# EAGLE board yrl039-1_0 (EAGLE 9.5.0)
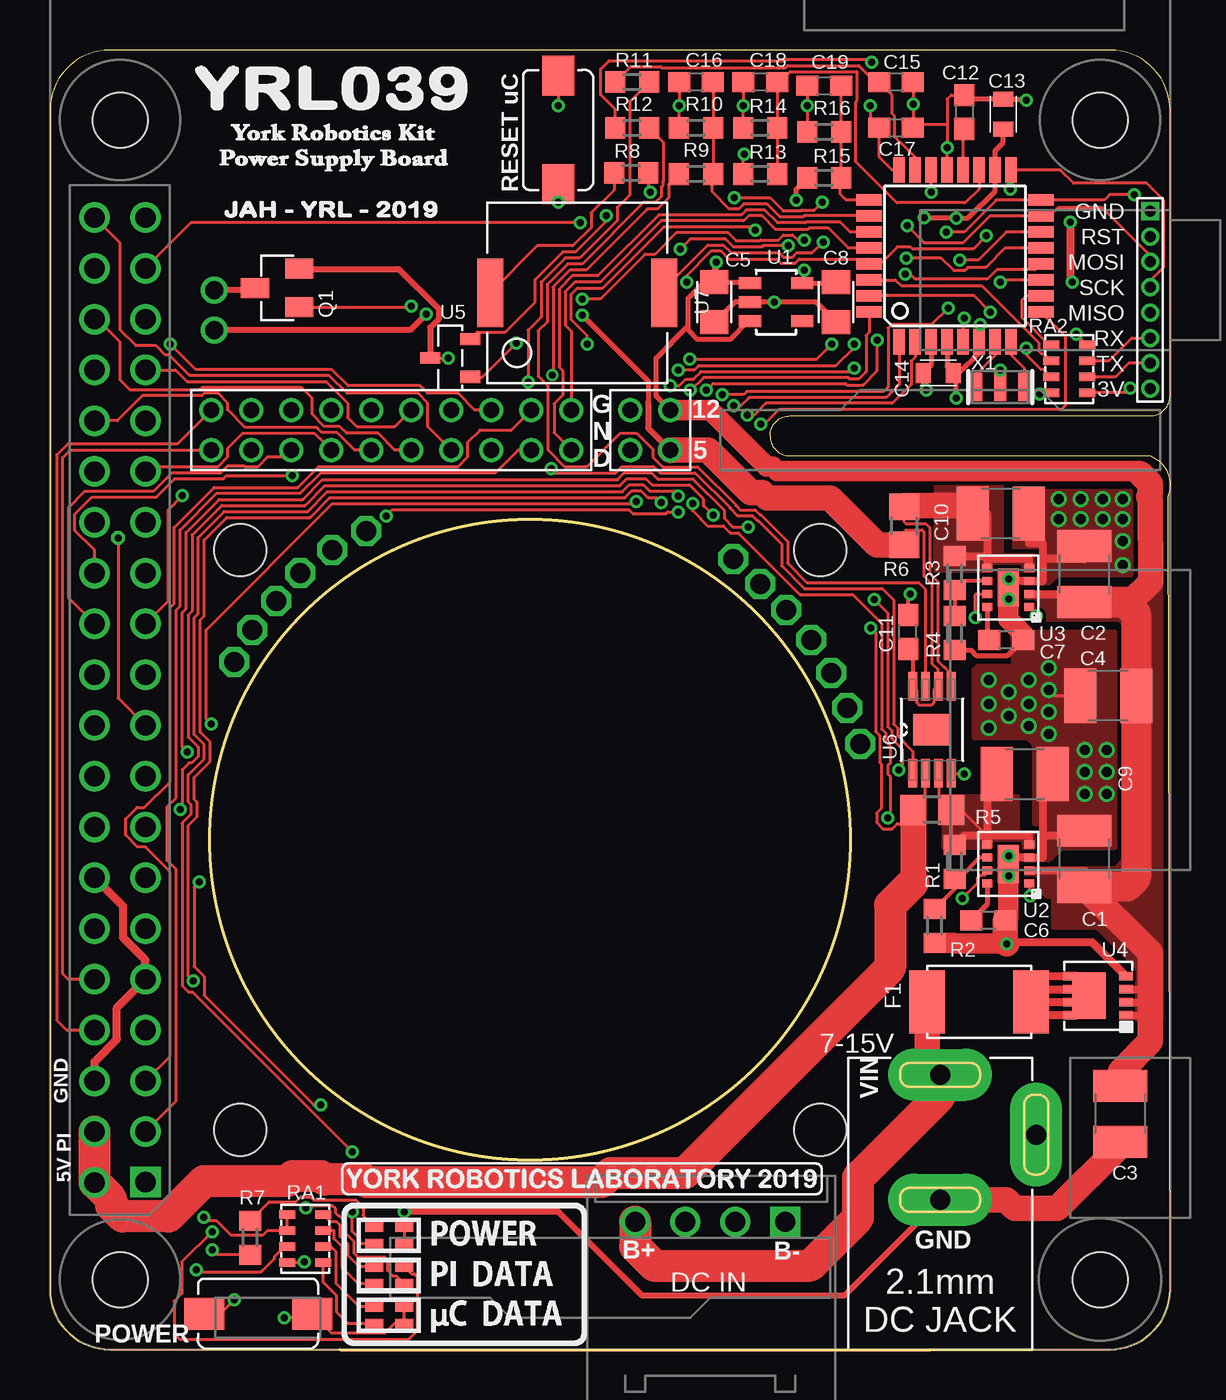
[diagram p0: board, top side]
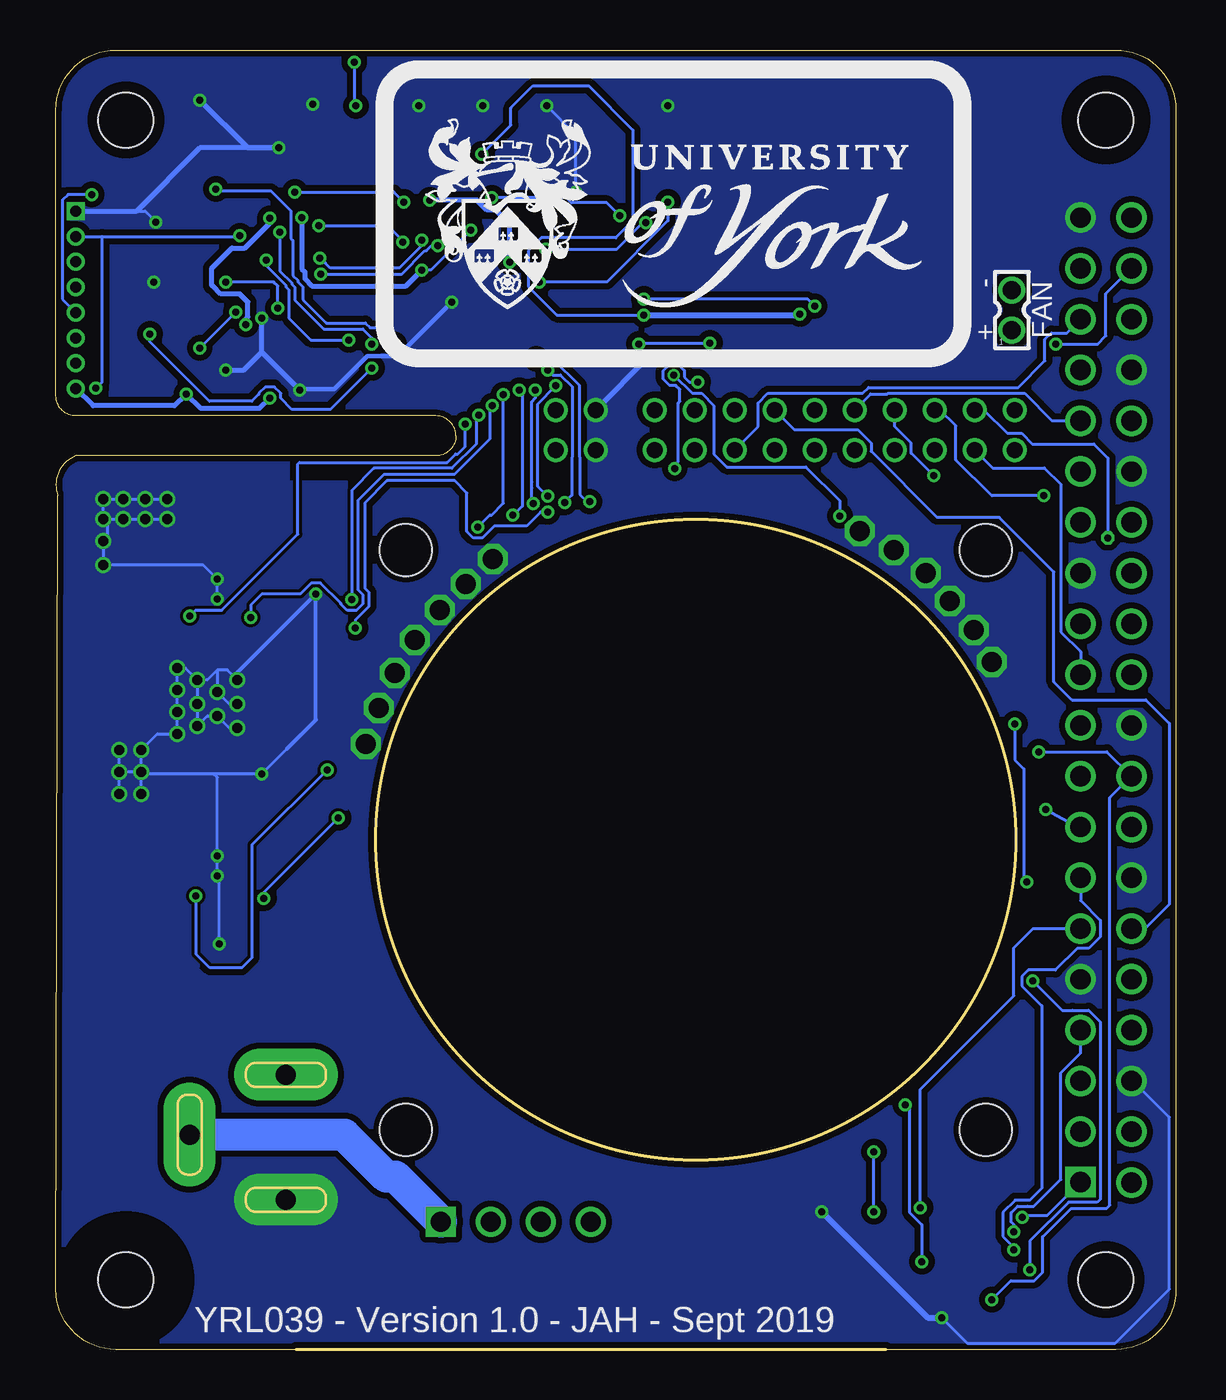
[diagram p1: board, bottom side, seen from below]

Size 56 x 65 mm. Coordinates in mm from the lower left corner, seen from the top.
Outline: 14.5,0 3,0 arc-90 0,3 0,62 arc-90 3,65 53,65 arc-90 56,62 56,47.7 arc-90 55,46.7 37,46.7 arc90 36,45.7 arc90 37,44.7 55,44.7 arc-90 55.9,42.7 56,3 arc-90 53,0 44,0
Outline: 14.5,0 18.5,0
Outline: 37.5,0 44,0
Outline: 14.5,0 44,0
Outline: circle at 24,25.5 radius 16
Copper layers (1*16): Top 0.018mm / dielectric 1.55mm / Bottom 0.018mm
Design rules "eC_2Layer_PClass6_BaseCopperO18_eCDefault": minimum track width 0.15mm, minimum drill 0.35mm, track to track 0.15mm, track to pad 0.15mm, pad to pad 0.15mm, via to via 0.15mm, smd to smd 0mil, copper to edge 0.25mm, drill to drill 0.35mm, minimum pad ring 0.175mm, minimum via ring 0.125mm, stop-mask expansion 0mil, vias tented up to drill 0.45mm, thermal gap 0.2mm
Holes 2.6 mm at 9.5,11 38.5,11 38.5,40 9.5,40
tRestrict: area 2.2,2.2 to 4.8,4.8; area 2.7,60.7 to 4.3,62.3; area 51,60 to 54,63; area 51,1.9 to 54,5
bRestrict: area 51,1.9 to 54,5; area 2,2 to 5,5; area 51.7,60.7 to 53.3,62.3; area 1.7,59.7 to 5.3,63.3

## Footprints (pad centres in the part's own frame; a part is rotated, then mirrored left to right if it is on the bottom)
C1210 = smd 1.6 x 2.7: 1 -1.4,0; 2 1.4,0
0805 = smd 1.2 x 1.4: P$1 -1,0; P$2 1,0
C0603 = smd 1.1 x 1: 1 -0.85,0; 2 0.85,0
0603-RESISTOR = smd 0.75 x 1: 1 -0.75,0; 2 0.75,0
PTC-FUSE-1812L260/16 = smd 1.78 x 3.15: P$1 2.6,0; P$2 -2.6,0
8-PIN-CONNECTOR-LHS = drill 0.55 pad 0.85 square: 1-GND 0,-4.445 | drill 0.55 pad 0.85: 2-RESET 0,-3.175; 3-MOSI 0,-1.905; 4-SCK 0,-0.635; 5-MISO 0,0.635; 6-RX 0,1.905; 7-TX 0,3.175; 8-3V 0,4.445
CONNECTOR-PAIRS = drill 0.8: AUDIO -14.94,-1; AUDIO_ON -12.94,-1; CE0 -18.94,-1; CE1 -16.94,1; GND1 -2,-1; GND2 -2,1; GPIO5 -16.94,-1; GPIO6 -14.94,1; GPIO13 -12.94,1; GPIO21 -10.94,-1; I2S_B -10.94,1; I2S_D -8.94,1; I2S_W -8.94,-1; MISO -20.94,-1; MOSI -20.94,1; RXD -22.94,-1; SCL -6.94,1; SCL_UC -4.94,1; SCLK -18.94,1; SDA -6.94,-1; SDA_UC -4.94,-1; TXD -22.94,1; V5 0,-1; V12 0,1
2.1MM-CON-SWITCHCRAFT-RAPC722X = drill 1 pad 2.6 long: PIN 0,13.74; SLEEVE 0,7.49; SWITCH 4.81,10.75
JST-4PIN-XH-RA-1516291 = drill 1: P$1 0,0; P$2 0,-2.5; P$3 0,-5 | drill 1 square: P$4 0,-7.5
3-LED-STATUS = smd 0.9 x 0.5: PI_DATA_GRN_A 1.8,4.05; PI_DATA_GRN_C 3.3,4.05; PI_DATA_RED_A 1.8,3.2; PI_DATA_RED_C 3.3,3.2; PWR_GRN_A 1.8,6.05; PWR_GRN_C 3.3,6.05; PWR_RED_A 1.8,5.2; PWR_RED_C 3.3,5.2; UC_DATA_GRN_A 1.8,2.05; UC_DATA_GRN_C 3.3,2.05; UC_DATA_RED_A 1.8,1.2; UC_DATA_RED_C 3.3,1.2
RPI3 = drill 1.016 square: P$1 8.37,51.23 | drill 1.016: P$2 8.357,53.772; P$3 10.897,51.232; P$4 10.897,53.772; P$5 13.437,51.232; P$6 13.437,53.772; P$7 15.977,51.232; P$8 15.977,53.772; P$9 18.517,51.232; P$10 18.517,53.772; P$11 21.057,51.232; P$12 21.057,53.772; P$13 23.597,51.232; P$14 23.597,53.772; P$15 26.137,51.232; P$16 26.137,53.772; P$17 28.677,51.232; P$18 28.677,53.772; P$19 31.217,51.232; P$20 31.217,53.772; P$21 33.757,51.232; P$22 33.757,53.772; P$23 36.297,51.232; P$24 36.297,53.772; P$25 38.837,51.232; P$26 38.837,53.772; P$27 41.377,51.232; P$28 41.377,53.772; P$29 43.917,51.232; P$30 43.917,53.772; P$31 46.457,51.232; P$32 46.457,53.772; P$33 48.997,51.232; P$34 48.997,53.772; P$35 51.537,51.232; P$36 51.537,53.772; P$37 54.077,51.232; P$38 54.077,53.772; P$39 56.617,51.232; P$40 56.617,53.772 | hole 2.75: 3.5,3.5; 61.5,3.5; 3.5,52.5; 61.5,52.5
PKMCS-PIEZO = smd 1.3 x 3.4: P$1 -4.35,0; P$2 4.35,0
FDV303N-SOT-23-NMOS = smd 1 x 1.4: P$1 -0.95,-1.1; P$2 0.95,-1.1; P$3 0,1.1
R0603 = smd 1 x 1.1: 1 -0.85,0; 2 0.85,0
R0805 = smd 1.3 x 1.5: 1 -0.95,0; 2 0.95,0
1206-RES-ARRAY = smd 0.42 x 0.8: P$1 -1.2,-0.9; P$2 -0.4,-0.9; P$3 0.4,-0.9; P$4 1.2,-0.9; P$5 1.2,0.9; P$6 0.4,0.9; P$7 -0.4,0.9; P$8 -1.2,0.9
6X3.5-SWITCH = smd 2 x 1.6: 1 -2.7,0; 2 2.7,0
INA138-CURRENTSHUNT = smd 1.1 x 0.6: P$1 -1.3,0.95; P$2 -1.3,0; P$3 -1.3,-0.95; P$4 1.3,-0.95; P$5 1.3,0.95
TPS82130-MODULE = smd 0.5 x 0.4: P$1 -1.05,0.975; P$2 -1.05,0.325; P$3 -1.05,-0.325; P$4 -1.05,-0.975; P$5 1.05,-0.975; P$6 1.05,-0.325; P$7 1.05,0.325; P$8 1.05,0.975 | smd 1.1 x 1.9: P$9 0,0
FR014H5JZ = smd 0.42 x 0.7: P$1 -0.975,-1.4; P$2 -0.325,-1.4; P$3 0.325,-1.4; P$4 0.975,-1.4; P$5 0.975,1.4; P$6 0.325,1.4; P$7 -0.325,1.4; P$8 -0.975,1.4 | smd 2.37 x 1.7: P$9 0,0.45
TC1046-TEMP-SENSOR = smd 0.6 x 1: P$1 -0.95,-1; P$2 0.95,-1; P$3 0,1
SOP65P490X110-9N = smd 1.422 x 0.432: 1 -2.184,0.965; 2 -2.184,0.33; 3 -2.184,-0.33; 4 -2.184,-0.965; 5 2.184,-0.965; 6 2.184,-0.33; 7 2.184,0.33; 8 2.184,0.965 | smd 1.575 x 1.88: 9 0,0
TQFP32-08 = smd 1.27 x 0.559: 1 -4.293,2.8; 2 -4.293,2; 3 -4.293,1.2; 4 -4.293,0.4; 5 -4.293,-0.4; 6 -4.293,-1.2; 7 -4.293,-2; 8 -4.293,-2.8; 17 4.293,-2.8; 18 4.293,-2; 19 4.293,-1.2; 20 4.293,-0.4; 21 4.293,0.4; 22 4.293,1.2; 23 4.293,2; 24 4.293,2.8 | smd 0.559 x 1.27: 9 -2.8,-4.293; 10 -2,-4.293; 11 -1.2,-4.293; 12 -0.4,-4.293; 13 0.4,-4.293; 14 1.2,-4.293; 15 2,-4.293; 16 2.8,-4.293; 25 2.8,4.293; 26 2,4.293; 27 1.2,4.293; 28 0.4,4.293; 29 -0.4,4.293; 30 -1.2,4.293; 31 -2,4.293; 32 -2.8,4.293
RESONATOR = smd 0.6 x 1.4: 1 -1.2,0; 2 0,0; 3 1.2,0
87758-0216 = drill 0.9 pad 1.27: 1 0,-1; 2 0,1

## Placement (x,y rotation side)
C1  10uF 25V  [C1210]  51.72,24.55 90 top
C2  10uF 25V  [C1210]  51.72,38.78 90 top
C3  10uF 25V  [C1210]  53.5,11.8 270 top
C4  10uF 25V  [C1210]  52.9,32.7 180 top
C5  1u 25V  [0805]  33.2,52.4 90 top
C6  3.3nF  [C0603]  46.91,21.47 0 top
C7  3.3nF  [C0603]  47.81,35.5 0 top
C8  1uF  [0805]  39.3,52.4 90 top
C9  47uF 10V  [C1210]  48.74,28.79 0 top
C10  47uF 10V  [C1210]  47.54,41.82 0 top
C11  100nF  [C0603]  42.9,35.9 90 top
C12  100n  [C0603]  45.7,61.9 270 top
C13  1u  [0603-RESISTOR]  47.65,61.8 90 top
C14  100n  [0603-RESISTOR]  44.4,48.85 180 top
C15  100n  [C0603]  42.3,63.4 0 top
C16  100n  [C0603]  32.3,63.4 180 top
C17  100n  [C0603]  42.3,61.1 0 top
C18  100n  [C0603]  35.5,63.4 180 top
C19  100n  [C0603]  38.7,63.2 180 top
F1  1812L260/16  [PTC-FUSE-1812L260/16]  46.45,17.4 180 top
J1  8-PIN-ARD-CON-LHS  [8-PIN-CONNECTOR-LHS]  55,52.5 180 top
J2  CONNECTOR-PAIRS  [CONNECTOR-PAIRS]  31,46 0 top
J3  DC-JACK-RAPC7222X  [2.1MM-CON-SWITCHCRAFT-RAPC722X]  44.5,0 0 top
J4  JST-4PIN-RA-1516291  [JST-4PIN-XH-RA-1516291]  29.26,6.39 90 top
LED1  3-LED-STATUS-PANEL  [3-LED-STATUS]  14.4,0.1 0 top
LOGO1  YRL039  [YRL039]  7.1,55.7 0 top
LOGO2  UOY-LOGO-30MM  [UY-SS-30MM-WIDE]  40,49.15 0 bottom
LOGO3  YRL-2019-LOGO  [YRL2019-LOGO]  14.55,7.7 0 top
PCB1  RPI3  [RPI3]  56,0 90 top
PZ1  PIEZO-PKMCS0909E4000-2529461  [PKMCS-PIEZO]  26.35,52.85 180 top
Q1  FDV303N-MOSFET-9845020  [FDV303N-SOT-23-NMOS]  11.35,53.1 90 top
R1  523k  [R0603]  45.23,24.4 90 top
R2  100k  [R0603]  44.23,21.2 90 top
R3  523k  [R0603]  45.23,38.83 90 top
R4  100k  [R0603]  45.23,35.83 90 top
R5  5m  [R0805]  44.1,27 180 top
R6  5m  [R0805]  42.7,41.2 270 top
R7  1K  [R0603]  10,5.6 270 top
R8  100  [R0603]  29.05,58.85 180 top
R9  400K  [R0603]  32.3,58.8 180 top
R10  100K  [R0603]  32.3,61.1 0 top
R11  10K  [R0603]  29.1,63.4 0 top
R12  10K  [R0603]  29.1,61.1 0 top
R13  400K  [R0603]  35.5,58.8 180 top
R14  100K  [R0603]  35.5,61.1 0 top
R15  1M4  [R0603]  38.7,58.6 180 top
R16  100K  [R0603]  38.7,60.9 0 top
RA1  1K  [1206-RES-ARRAY]  12.75,5.55 270 top
RA2  1K  [1206-RES-ARRAY]  50.95,49.05 270 top
SW1  SWITCH-9471898  [6X3.5-SWITCH]  10.4,1.8 0 top
SW2  SWITCH-9471898  [6X3.5-SWITCH]  25.4,61 90 top
U1  NCP718-3V3LDO-2981166  [INA138-CURRENTSHUNT]  36.3,52.4 0 top
U2  TPS82130  [TPS82130-MODULE]  47.91,24.28 180 top
U3  TPS82130  [TPS82130-MODULE]  47.91,38.11 180 top
U4  FR014H5JZ  [FR014H5JZ]  52.4,17.7 90 top
U5  TC1046-1212685  [TC1046-TEMP-SENSOR]  20,49.6 90 top
U6  INA2180A4IDGKT  [SOP65P490X110-9N]  44.1,31 90 top
U7  ATMEGA328P-AU  [TQFP32-08]  45.25,54.7 90 top
X1  CSTCE8 8MHz Res.  [RESONATOR]  47.5,48.15 0 top
X2  87758-0216  [87758-0216]  8.2,52 0 bottom

## Library data of the parts
C1-C4 C6 C7 C9-C11 C15-C19 = rcl; SPICEPREFIX: C
C5 C8 = YRL-Passives
C12 = rcl
C13 C14 = idea
F1 LOGO3 = yrl028-library
J1 U1 = yrl029
J2-J4 = yrl012-exported
LED1 PCB1 = YRL028-014
LOGO1 Q1 U2-U5 = yrl039-library
LOGO2 = yrl-logos
PZ1 = yrl025-andgate
R1-R7 R9-R16 = rcl; SPICEPREFIX: R
R8 = resistor
RA1 RA2 = yrl012-exported2
SW1 SW2 = epuck-zero-lib
U6 = INA2180A4IDGKT; DESCRIPTION: INA2180 Low/High-Side Voltage Output Current-Sense Amplifier Dual Channel -0.2V to 26V 8-Pin VSSOP T/R; DIGI-KEY_PART_NUMBER: 296-47944-1-ND; DIGI-KEY_PURCHASE_URL: https://www.digikey.com/product-detail/en/texas-instruments/INA2180A4IDGKT/296-47944-1-ND/8286320?utm_source=snapeda&utm_medium=aggregator&utm_campaign=symbol; MF: Texas Instruments; MP: INA2180A4IDGKT; PACKAGE: MSOP-8 Texas Instruments
U7 = IntegratedCircuits; CASE: TQFP32_7x7; MONTHLY_USAGE: _____; PART_NUMBER: ATMEGA328P-AU; PRICE: _____; SUPPLIER: _____; TYPE: Circuito_Integrato
X1 = YRL028-007; MONTHLY_USAGE: _____; PART_NUMBER: CSTCE16M0V53-R0; PRICE: _____; SUPPLIER: _____; TYPE: Cristalli
X2 = con-molex; MF: MOLEX; MPN: 87758-0216; OC_FARNELL: unknown; OC_NEWARK: 94M1513

## Nets
+3V3_ARD: C8.P$2 C13.1 C14.1 J1.8-3V RA2.P$4 U1.P$5 U5.P$1 U7.4 U7.6 U7.18
+3V3_PI: PCB1.P$1 RA1.P$1 RA1.P$2
+5V_AUX: C11.1 J2.V5 R6.2 R13.2 U6.6 U6.8 X2.1
+5V_PI: PCB1.P$2 PCB1.P$4 R5.2 R9.2 U6.2
ARD_AUX: PCB1.P$37 U7.12
ARD_PC3: PCB1.P$15 U7.14
AREF: C12.2 U7.20
AUDIO_ON: J2.AUDIO_ON PCB1.P$36
AUDIO_OUT: J2.AUDIO PCB1.P$32
BATTERY-: J3.SWITCH J4.P$4
CE0: J2.CE0 PCB1.P$24
CE1: J2.CE1 PCB1.P$26
D11/MOSI: J1.3-MOSI PZ1.P$1 U7.15
D12/MISO: J1.5-MISO RA1.P$3 U7.16
D13/SCK: J1.4-SCK RA1.P$4 U7.17
ENABLE_V5_AUX: U3.P$1 U7.9
ENABLE_V5_PI: U2.P$1 U7.2
FAN_PWM: Q1.P$1 U7.13
GND: C1.2 C2.2 C3.2 C4.2 C5.P$1 C6.2 C7.2 C8.P$1 C9.2 C10.2 C11.2 C12.1 C13.2 C14.2 C15.2 C16.2 C17.2 C18.2 C19.2 J1.1-GND J2.GND1 J2.GND2 J3.SLEEVE LED1.PWR_GRN_C LED1.PWR_RED_C LED1.UC_DATA_GRN_C LED1.UC_DATA_RED_C PCB1.P$6 PCB1.P$9 PCB1.P$14 PCB1.P$20 PCB1.P$25 PCB1.P$30 PCB1.P$34 PCB1.P$39 Q1.P$2 R2.1 R4.1 R8.1 R10.1 R14.1 R16.1 SW1.2 SW2.2 U1.P$2 U2.P$3 U2.P$9 U3.P$3 U3.P$9 U4.P$4 U5.P$3 U6.4 U7.3 U7.5 U7.21 X1.2
GPIO5: J2.GPIO5 PCB1.P$29
GPIO6: J2.GPIO6 PCB1.P$31
GPIO13: J2.GPIO13 PCB1.P$33
GPIO21: J2.GPIO21 PCB1.P$40
I2S_BCLK: J2.I2S_B PCB1.P$12
I2S_DATA: J2.I2S_D PCB1.P$38
I2S_WS: J2.I2S_W PCB1.P$35
ISENSE_AUX_LPF: C17.1 R12.1 U7.24
ISENSE_PI_LPF: C15.1 R11.1 U7.23
MISO: J2.MISO PCB1.P$21
MOSI: J2.MOSI PCB1.P$19
N$1: RA2.P$3 U7.31
N$2: RA2.P$2 U7.30
N$3: LED1.PWR_GRN_A R7.1
N$4: Q1.P$3 X2.2
N$8: C7.1 U3.P$8
N$9: R3.1 R4.2 U3.P$6
N$10: C6.1 U2.P$8
N$11: R1.1 R2.2 U2.P$6
N$18: U7.7 X1.1
N$19: U7.8 X1.3
N$28: PZ1.P$2 R8.2
N$36: LED1.PI_DATA_GRN_A RA1.P$8
N$37: LED1.PI_DATA_RED_A RA1.P$7
PCB_TEMP: U5.P$2 U7.22
PDIV_V5_AUX_LPF: C18.1 R13.1 R14.2 U7.19
PDIV_V5_PI_LPF: C16.1 R9.1 R10.2 U7.26
PDIV_VBATT_LPF: C19.1 R15.1 R16.2 U7.25
PGOOD_AUX: U3.P$7 U7.1
PGOOD_PI: U2.P$7 U7.32
PI_DATA_GRN_C: LED1.PI_DATA_GRN_C PCB1.P$7
PI_DATA_RED_C: LED1.PI_DATA_RED_C PCB1.P$11
POWER_BUTTON: PCB1.P$18 SW1.1 U7.11
POWER_LED_GREEN: PCB1.P$13 R7.2
RED_POWER: LED1.PWR_RED_A RA2.P$8
RED_POWER_LED: RA2.P$1 U7.10
RESET: J1.2-RESET RA2.P$5 SW2.1 U7.29
RX: J1.6-RX RA2.P$7
RXD: J2.RXD PCB1.P$10
SCL_MASTER: J2.SCL PCB1.P$5
SCL_UC: J2.SCL_UC U7.28
SCLK: J2.SCLK PCB1.P$23
SDA_MASTER: J2.SDA PCB1.P$3
SDA_UC: J2.SDA_UC U7.27
TX: J1.7-TX RA2.P$6
TXD: J2.TXD PCB1.P$8
UCUSER_GRN_A: LED1.UC_DATA_GRN_A RA1.P$6
UCUSER_RED_A: LED1.UC_DATA_RED_A RA1.P$5
VIN: C1.1 C2.1 C3.1 C4.1 C5.P$2 J2.V12 R15.2 U1.P$1 U1.P$3 U2.P$2 U3.P$2 U4.P$1 U4.P$2 U4.P$3
VIN_POSTFUSE: F1.P$2 U4.P$5 U4.P$6 U4.P$7 U4.P$8 U4.P$9
VIN_PREFUSE: F1.P$1 J3.PIN J4.P$1
VOUT_1: C10.1 R3.2 R6.1 U3.P$4 U3.P$5 U6.5
VOUT_2: C9.1 R1.2 R5.1 U2.P$4 U2.P$5 U6.3
VSENSE_5V_AUX: R12.2 U6.7
VSENSE_5V_PI: R11.2 U6.1

## Tracks (layer width: path | path; a pad name or v marks a point on that pad's centre or on a via)
+3V3_ARD  (via drill 0.35 pad 0.65)
  Top 0.15: 45.3,48.7 C14.1 45.05,48.95 | U5.P$1 21.6,48.65 v23.3,50.35 | v37.7,54 37.7,53.35 | v35.25,56 35.1,56.15 30.68,56.15 27.63,53.1 26.37,53.1 26.05,52.78 26.05,51.52 26.85,50.72 v26.85,50.3
  Top 0.2: U1.P$5 37.7,53.45 v37.7,54
  Top 0.254: v49.48,47.8 49.52,47.85 RA2.P$4 | v45.3,47.6 45.3,48.7 46.5,49.9 46.5,50.36 U7.6 46.45,51.22 v46.5,51.27 | U7.4 44.85,49.15 45.05,48.95 | C13.1 47.65,60.35 47.25,59.95 U7.18 47.25,57.95 45.89,56.59 v45.31,56.59 v45.3,56.6 v43.7,56.6 | U1.P$5 37.7,53.35 39.25,53.35 C8.P$2
  Bottom 0.15: v26.85,50.3 26.8,50.35 v23.3,50.35 | v35.25,56 37.25,54 v37.7,54
  Bottom 0.254: J1.8-3V 54.15,47.2 50.08,47.2 v49.48,47.8 48.75,47.08 45.82,47.08 v45.3,47.6 | v46.5,51.27 46.5,51.55 46.4,51.65 46.4,52.4 46.8,52.8 47.75,52.8 48.15,53.2 48.2,53.2 48.2,54.1 47.2,55.1 46.55,55.1 45.31,56.34 v45.31,56.59 | v43.7,56.6 43.7,54.05 43.55,53.9 43.55,53.55 43.2,53.2 38.5,53.2 v37.7,54
+3V3_PI  (via drill 0.35 pad 0.65)
  Top 0.15: RA1.P$1 RA1.P$2 10.87,5.95 10.64,5.72 9.05,5.72 8.33,6.45 7.85,6.45 v7.68,6.62
  Bottom 0.15: v7.68,6.62 7.6,6.7 6.45,6.7 5.49,7.66 5.48,7.66 PCB1.P$1
+5V_AUX  (via drill 0.35 pad 0.65)
  Top 0.15: R6.2 42.7,40.9 42.8,41 43.6,41 43.7,40.9 43.7,38.68 44.12,38.26 44.12,34.3 44.4,34.02 44.4,33.22 | 44.4,33.22 U6.6 | R13.2 34.65,59.75 v34.7,59.8 | U6.8 43.33,32.99 43.33,32.38 43.46,32.25 44.08,32.25 44.21,32.38 44.21,33.02 44.4,33.22
  Top 0.2: C11.1 43.13,34.81 U6.8
  Top 0.254: v26.6,51.75 29.9,48.45 29.9,47.35
  Top 0.305: J2.V5 29.9,46.1 29.9,47.35 | v18.8,51.8 18,51 X2.1
  Top 1.27: R6.2 41.35,40.25 39,42.6 35.87,42.6 35.61,42.86 35.04,42.86 32.9,45 J2.V5
  Bottom 0.15: v34.7,59.8 33.25,61.25 33.25,62.1 32.15,63.2 29.35,63.2 27.15,61 27.15,56.45 28,55.6 31.73,55.6 32.38,54.95 32.38,53.17 30.95,51.75 v26.6,51.75
  Bottom 0.305: v26.6,51.75 18.85,51.75 v18.8,51.8
+5V_PI  (via drill 0.35, 0.35 pad 0.65)
  Top 0.15: U6.2 43.77,27.62 R5.2 | R9.2 30.93,58.27 30.93,57.62 30.35,57.05 29.85,57.05 26.8,54 26,54 25.15,53.15 25.15,48.8 v25.1,48.75 | v41.02,36.1 41.27,35.85 41.27,30.9 41.48,30.7 41.48,29.38 41.55,29.3 41.55,27.05 41.33,26.83 41.33,26.37 41.65,26.05 42.1,26.05 42.35,26.3 43.15,26.3 | v16.8,41.7 17.11,42.01 28.94,42.01 29.14,41.81 30.8,41.81 30.88,41.89 v31.42,41.89
  Top 1.3: R5.2 43.15,26.3 43.15,23.36
  Top 1.6: PCB1.P$4 PCB1.P$2 3.06,7.53 3.06,7.21 3.62,6.66 5.93,6.66 7.69,8.43 11.87,8.43 12.12,8.67 13.56,8.67 13.72,8.51 15.72,8.51 15.85,8.37 27.59,8.37 28.03,8.82 31.74,8.82 42.01,19.09 42.01,22.22 43.15,23.36
  Bottom 0.15: v41.02,36.1 41.02,36.5 40.35,37.17 40.35,37.88 40.55,38.08 40.55,42.35 39.45,43.45 36.05,43.45 35.45,42.85 35.45,40.92 35.13,40.6 34.67,40.6 34.07,41.2 32.46,41.2 31.77,41.89 v31.42,41.89 | v25.1,48.75 24.18,47.83 23.72,47.83 23.1,47.21 23.1,44.8 22.45,44.15 18.5,44.15 16.8,42.45 v16.8,41.7
ARD_AUX  (via drill 0.35 pad 0.65)
  Top 0.15: U7.12 49.25,54 47.33,54 46.87,53.55 43.25,53.55 43,53.8 v42.75,53.8 | v36.9,55.2 35.65,55.2 35.6,55.15 34.18,55.15 33.78,55.55 32,55.55 v31.5,55.05 | v26.5,56.35 7.04,56.35 PCB1.P$37
  Bottom 0.15: v42.75,53.8 38.7,53.8 37.55,54.95 37.47,54.95 37.22,55.2 v36.9,55.2 | v31.5,55.05 27.95,55.05 26.65,56.35 v26.5,56.35
ARD_PC3  (via drill 0.35 pad 0.65)
  Top 0.15: U7.14 47.8,55.9 46.4,54.5 v45.48,54.5 | v41.35,50.5 41.35,48.95 40.65,48.25 39.85,48.25 39.78,48.32 33.16,48.32 v32.82,47.98 | v6.5,27.01 6.5,27.03 6.6,27.13 6.6,29 6.95,29.35 7.08,29.35 7.4,29.67 7.4,30.13 6.9,30.63 6.9,36.73 7.1,36.93 7.1,40.75 8.58,42.23 12.75,42.23 13.73,43.21 28.49,43.21 28.84,43.56 29.8,43.56 30.11,43.24 31.98,43.24 32.68,42.53 32.68,42.18 32.72,42.18 v33.15,41.75
  Bottom 0.15: v32.82,47.98 32.68,47.84 32.68,42.18 33.11,41.75 v33.15,41.75 | v6.5,27.01 4.8,26.1 PCB1.P$15 | v41.35,50.5 43.25,50.5 44.35,51.6 44.35,53 44.5,53.16 44.5,53.23 45.43,54.15 45.43,54.5 v45.48,54.5
AREF
  Top 0.152: U7.20 45.65,61 C12.2
AUDIO_ON
  Top 0.15: J2.AUDIO_ON 17.23,45 16.4,45.83 14.83,45.83 14.48,46.17 13.72,46.17 13.1,46.79 13.1,47.6 12.57,48.12 7.59,48.12 7.47,48 4,48 3.5,48.5 3.5,50.4 2.36,51.54 PCB1.P$36
AUDIO_OUT
  Top 0.15: PCB1.P$32 3.37,46.46 4.62,47.7 7.59,47.7 7.72,47.83 8.4,47.83 8.88,47.34 8.88,47.01 9.77,46.12 13.34,46.12 13.59,45.88 14.35,45.88 15.23,45 J2.AUDIO
BATTERY-
  Bottom 1.6: J4.P$4 39.02,8.65 39.47,8.65 41.57,10.75 J3.SWITCH
CE0
  Top 0.15: PCB1.P$24 0.93,37.6 0.93,42.12 1.73,42.93 5.18,42.93 6.11,43.86 8.54,43.86 8.88,44.2 9.69,44.2 9.72,44.17 10.4,44.17 10.88,44.66 11.72,44.66 J2.CE0
CE1  (via drill 0.35 pad 0.65)
  Top 0.15: PCB1.P$26 2.23,39.98 1.24,40.97 1.24,41.78 2.08,42.63 5.3,42.63 6.23,43.56 8.3,43.56 8.6,43.56 8.67,43.56 8.81,43.7 v12.1,43.7
  Bottom 0.15: v12.1,43.7 13.23,44.84 13.23,45.34 14.06,46.17 J2.CE1
D11/MOSI  (via drill 0.35 pad 0.65)
  Top 0.15: J1.3-MOSI 55,54.72 52.62,57.1 50.38,57.1 49.98,56.7 U7.15 47,56.7 45.65,55.35 43.7,55.35 v42.85,56.2 | PZ1.P$1 31.27,53.42 31.27,53.63 32.9,55.25 33.65,55.25 34.05,54.85 36.47,54.85 36.67,54.65 37.13,54.65 37.33,54.85 38.1,54.85 v38.65,55.4
  Bottom 0.15: v42.85,56.2 39.4,56.2 38.65,55.45 v38.65,55.4
D12/MISO  (via drill 0.35 pad 0.65)
  Top 0.15: v54.21,57.77 52.98,57.77 52.7,57.5 U7.16 47.3,57.5 45.7,55.9 v44.8,55.9 | v40.2,50.3 40.2,50.12 39.29,49.22 32.43,49.22 32.21,49 v31.4,49 | v30.57,42.36 30.32,42.61 29.9,42.61 29.55,42.96 29.09,42.96 28.74,42.61 13.98,42.61 13,41.62 8.83,41.62 7.7,40.5 7.7,36.68 7.5,36.48 7.5,30.88 8,30.38 8,29.42 7.2,28.62 7.2,27.51 7.35,27.36 7.35,26.66 6.9,26.21 6.9,18.68 v7.15,18.43 | v7.3,4 7.4,3.9 10.55,3.9 11.22,4.58 11.22,4.65 11.72,5.15 RA1.P$3
  Bottom 0.15: v31.4,49 31.15,48.75 30.77,48.75 30.18,48.15 30.18,44.66 30.2,44.63 30.2,42.73 v30.57,42.36 | v7.15,18.43 5.69,16.96 | v40.2,50.3 40.2,50.6 40.65,51.05 42.6,51.05 44.05,52.5 44.05,53.13 44.2,53.28 44.2,53.35 44.8,53.95 v44.8,55.9 | J1.5-MISO 55.67,52.54 55.67,57.49 55.39,57.77 v54.21,57.77
  Bottom 0.152: 5.69,16.96 5.18,16.96 4.36,16.96 3.78,16.39 3.78,7.52 3.93,7.36 5.37,7.36 7.3,5.43 v7.3,4
D13/SCK  (via drill 0.35 pad 0.65)
  Top 0.15: v48,58.05 48,58.94 U7.17 50.52,58.99 51.19,58.33 54.84,58.33 55.67,57.49 55.67,54.12 55,53.45 J1.4-SCK | v8.05,31.3 7.8,31.55 7.8,36 14.11,42.31 29.22,42.31 v29.32,42.41 | v7.45,23.38 7.2,23.13 7.2,19.16 7.7,18.66 7.7,17.72 13.21,12.21 13.51,12.21 v13.54,12.24 | v12.7,4.4 12.65,4.35 RA1.P$4 | v31.98,49.55 38.35,49.55 v39.08,50.29
  Bottom 0.15: v31.98,49.55 31.15,49.55 29.82,48.23 29.82,44.66 29.8,44.63 29.8,42.77 29.44,42.41 v29.32,42.41 | v8.05,31.3 8.05,29.49 7.6,29.04 7.6,23.53 v7.45,23.38 | v12.7,4.4 12.7,6.25 13.32,6.87 13.32,12.03 v13.54,12.24 | v39.08,50.29 39.91,51.11 40.29,51.11 40.53,51.35 42.48,51.35 43.65,52.52 43.65,53.15 43.9,53.41 43.9,53.48 44.15,53.72 44.15,55.47 44.25,55.57 44.25,56.95 45.25,57.95 47.9,57.95 v48,58.05
ENABLE_V5_AUX  (via drill 0.35 pad 0.65)
  Top 0.15: v35.54,46.3 35.71,46.3 36.44,47.02 50.55,47.02 50.75,47.23 50.75,50.69 U7.9 | U3.P$1 49.3,36.8 v49.3,36.7
  Bottom 0.15: v49.3,36.7 49.02,36.98 47.7,36.98 43.9,40.78 43.9,44.3 43.83,44.38 36.44,44.38 36.02,44.8 35.9,44.8 35.54,45.16 v35.54,46.3
ENABLE_V5_PI  (via drill 0.35 pad 0.65)
  Top 0.15: U2.P$1 48.96,22.74 v49,22.7 | v34.86,46.74 35.21,46.74 35.79,47.33 42.1,47.33 43.05,48.27 43.05,49.44 43.25,49.64 U7.2 | v41.2,37.52 41.88,36.85 41.88,31.15 42.08,30.95 42.08,30.55 42.6,30.03 42.6,29 v42.44,29
  Bottom 0.15: v49,22.7 49,19.8 48.3,19.1 46.7,19.1 46.2,19.6 46.2,25.24 v42.44,29 | v34.86,46.74 34.99,46.61 34.99,45.28 36.2,44.08 40.1,44.08 41.2,42.98 v41.2,37.52
FAN_PWM  (via drill 0.35 pad 0.65)
  Top 0.15: Q1.P$1 18.02,52.15 v18.06,52.19 | v37.7,55.5 37.7,55.45 37.43,55.45 37.13,55.75 36.67,55.75 36.42,55.5 35.53,55.5 35.48,55.45 34.3,55.45 33.9,55.85 31.3,55.85 30.23,54.77 29.73,54.77 27.5,52.55 v26.6,52.55 | U7.13 47.76,55.1 46.78,54.12 45.88,54.12 45.71,53.95 45.2,53.95 44.55,54.6 v42.8,54.6
  Bottom 0.15: v18.06,52.19 18.42,52.55 v26.6,52.55 | v42.8,54.6 42.55,54.35 42.52,54.35 42.27,54.1 38.82,54.1 37.7,55.22 v37.7,55.5
GND  (via drill 0.35 pad 0.65, 0.5 pad 0.8, 1 pad 1.5)
  Top 0.15: v45.7,28.8 45.08,28.8 U6.4 | C4.2 50.23,32.7 v49.93,33 | R14.1 v34.65,62.2 C18.2 | R10.1 v31.45,62.2 C16.2 | C19.2 v37.85,62.2 R16.1 | U7.21 v44.85,60.1 44.85,61.3 | C12.1 45.05,62.75 44.85,62.55 44.85,61.3 | C15.2 v43.15,62.3 C17.2 43.35,61.3 44.85,61.3 | X1.2 v47.5,49 | v45.7,51.6 45.65,51.55 U7.5 | R8.1 29.9,58 v30,57.9 | LED1.UC_DATA_GRN_C LED1.UC_DATA_RED_C 17.22,1.3 16.74,0.82 14.07,0.82 SW1.2 12.9,1.6 v11.7,1.6 | SW2.2 v25.4,62.2 | LED1.PWR_GRN_C LED1.PWR_RED_C | 51,53.5 v51.1,53.4 | U5.P$3 v19.9,49.6
  Top 0.2: C11.2 42.9,37.7 v43,37.8
  Top 0.254: R4.1 46.04,34.98 46.3,34.72 47.88,34.72 C7.2 | U7.3 44.05,49.25 C14.2 43.65,48.15 v43.8,48 | C12.1 45.9,62.55 C13.2 48.75,62.55 v48.8,62.5 | C8.P$1 38.3,52.4 v36.2,52.4 U1.P$2 34.26,52.4 33.31,51.48 33.21,51.39 C5.P$1 | C5.P$1
  Top 0.305: J3.SLEEVE 39.71,2.7 29.6,2.7 25.4,6.9 v17.7,6.9 LED1.PWR_GRN_C | U5.P$3 19,51.11 19.43,51.54 19.43,52.06 17.44,54.05 Q1.P$2
  Top 0.406: U3.P$9 48.23,38.44 U3.P$3 49.63,38.44 49.63,39.53 | C2.2 51.72,39.53 49.63,39.53 | C10.2 48.94,40.33 49.63,40.33 49.63,39.53 | U2.P$9 48.23,24.61 U2.P$3 49.63,24.61 49.63,25.7 | C1.2 51.72,25.7 49.63,25.7 | C9.2 49.63,28.28 49.63,25.7 | U4.P$4 52.1,20.37 47.76,20.37 | v51,56.4 51,53.5 | PCB1.P$6 2.23,14.4 3.34,15.52 3.34,17.09 PCB1.P$9 4.77,19.48 3.65,20.59 3.65,22.17 PCB1.P$14
  Top 1.016: U3.P$9 47.91,36.55 48.66,35.8 C7.2 | U2.P$9 47.91,21.62 C6.2 | R2.1 45.2,20.35 45.24,20.31 47.7,20.31 47.76,20.37
  Top 1.27: C6.2 47.76,20.37 v47.83,20.3 | J3.SLEEVE 47.82,7.49 48.25,7.07 50.37,7.07 53.5,10.2 C3.2
  Bottom 0.15: 44.45,30.05 v45.7,28.8 48.1,28.8 | 48.1,28.8 51.63,28.8 v51.73,28.9 | v51.73,28.9 51.8,28.9 | 51.8,28.9 52.8,28.9 | 52.8,28.9 v52.83,28.9 v52.83,30 | v51.73,27.8 51.73,28.83 51.8,28.9 | v52.83,27.8 52.83,28.87 52.8,28.9 | 48.1,28.8 47.93,28.63 v47.93,24.7 v47.93,23.7 47.83,23.6 v47.83,20.3 | v51.73,28.9 v51.73,30 50.93,30.8 v49.93,30.8 v49.93,31.9 v49.93,33 v49.93,34.1 49.53,34.1 v48.93,33.5 | v46.93,33.5 47.43,34 47.93,34 | 47.93,34 v47.93,32.9 47.33,32.3 v46.93,32.3 | 47.93,34 48.43,33.5 v48.93,33.5 | v48.93,33.5 v48.93,32.3 v48.93,31.2 48.43,31.7 v47.93,31.7 47.33,31.1 v46.93,31.1 | v47.93,37.53 v47.93,38.53 48.63,39.23 v53.63,39.23 v53.63,40.43 53.43,40.63 53.43,41.73 v53.63,41.53 | v53.63,41.53 v53.63,42.53 v52.63,42.53 v51.53,42.53 v50.43,42.53 | v50.43,41.53 v51.53,41.53 v52.63,41.53 v53.63,41.53 | v30,57.9 30,60.75 v31.45,62.2 | v11.7,1.6 10.43,0.33 3.02,0.33 0.33,3.02 0.33,11.62 2.6,13.9 2.6,13.81 PCB1.P$6 | J1.1-GND 51.55,56.95 v51,56.4
  Bottom 0.2: v46.93,33.5 46.93,33.87 v43,37.8 43,31.5 44.45,30.05
  Bottom 0.23: v36.2,52.4 38.49,50.11 38.49,50.04 38.84,49.69 40.44,49.69 42.08,48.05 43.85,48.05
  Bottom 0.254: 45.7,49.9 43.85,48.05 v43.8,48 | 45.7,49.9 v45.7,51.6 | v47.5,49 46.6,49 45.7,49.9 | J1.1-GND 51.95,56.95 48.8,60.1 v44.85,60.1 46.4,60.1 v48.8,62.5 | v19.9,49.6 24.71,49.6 24.74,49.63 26.37,49.63 J2.GND2
  Bottom 0.305: v17.7,6.9 12.4,1.6 v11.7,1.6
  other vias: 40.5,30.3 39.85,32.1 39.05,33.85 38.05,35.5 36.8,37 35.5,38.3 34.15,39.55 15.8,40.95 14.1,40 12.5,38.85 11.3,37.45 10.1,36 9.2,34.4
  pour Bottom (isolate 0.305, rank 6, no thermals): 55.9,-0.2 55.9,43.4 arc90 54.6,44.7 37,44.7 arc-90 36,45.7 arc-90 37,46.7 55,46.7 arc90 56,47.7 56,62 arc90 53,65 3,65 arc90 0,62 0,0
  pour Top (no thermals): 48.63,38.33 48.63,38.53 49.63,38.53 49.63,40.13 48.23,40.13 48.23,42.93 54.03,42.93 54.03,38.73 50.33,38.73 49.93,38.33
  pour Top (no thermals): 48.63,24.5 48.63,24.7 49.63,24.7 49.63,26.3 49.23,26.3 49.23,30.27 48.9,30.6 46.2,30.6 46.2,34 46.4,34.2 48.2,34.2 48.13,35.9 53.23,35.9 53.23,25.1 50.53,25.1 49.93,24.5
  pour Bottom (no thermals): 41.5,19.2 55.5,19.2 55.5,43.4 41.5,43.4
GPIO5
  Top 0.15: J2.GPIO5 13.48,45.58 13.47,45.58 13.22,45.83 9.62,45.83 8.88,45.09 8.88,44.66 8.4,44.17 5.03,44.17 PCB1.P$29
GPIO6
  Bottom 0.15: PCB1.P$31 6.2,46.46 7.57,47.83 14.4,47.83 14.43,47.8 15.26,47.8 J2.GPIO6
GPIO13
  Top 0.15: J2.GPIO13 17.23,46.17 15.32,46.17 14.88,46.62 14.88,47.34 13.8,48.42 6.85,48.42 6.28,49 PCB1.P$33
GPIO21
  Top 0.15: J2.GPIO21 18.89,46.17 18.89,47.34 18.4,47.83 14.85,47.83 13.95,48.73 6.97,48.73 5.95,49.75 5.77,49.75 5.32,50.2 4.3,50.2 3.5,51 3.5,55.34 PCB1.P$40
I2S_BCLK
  Bottom 0.15: J2.I2S_B 19.06,46 15.89,46 15.23,45.34 15.23,44.94 11.93,41.62 8.83,41.62 6.1,38.9 6.1,33.4 5.2,32.5 1.5,32.5 0.33,31.32 0.33,22.27 1.54,21.06 PCB1.P$12
I2S_DATA  (via drill 0.35 pad 0.65)
  Top 0.15: J2.I2S_D 21.23,47 20.4,47.83 18.88,47.83 18.5,48.2 14.9,48.2 14.07,49.02 7.28,49.02 v6,50.3
  Bottom 0.15: v6,50.3 3.9,50.3 3.5,50.7 3.5,52.8 PCB1.P$38
I2S_WS
  Bottom 0.15: J2.I2S_W 20.89,46.17 20.89,47.34 20.4,47.83 15.66,47.83 15.36,48.12 7.88,48.12 6.55,49.45 6.55,50.53 6.23,50.85 5.46,50.85 PCB1.P$35
ISENSE_AUX_LPF  (via drill 0.35 pad 0.65)
  Top 0.15: U7.24 42.11,58.99 41.45,59.65 C17.1 41,61.55 v41,62.2 | R12.1 28.25,62.03 27.52,62.76 27.52,64.04 27.96,64.47 36.71,64.47 36.76,64.53 40.93,64.53 v41.08,64.38
  Bottom 0.15: v41.08,64.38 41.08,62.28 v41,62.2
ISENSE_PI_LPF
  Top 0.15: U7.23 43.25,59.65 42.52,60.38 42.51,60.38 42.23,60.66 42.23,61.69 42.1,61.82 42.1,62.75 C15.1 41.27,63.4 40.45,64.22 36.88,64.22 36.78,64.12 30.59,64.12 30.54,64.17 29.02,64.17 R11.1
MISO
  Bottom 0.15: PCB1.P$21 4.77,34.9 5.75,35.89 5.75,43.28 6.58,44.1 9.16,44.1 J2.MISO
MOSI  (via drill 0.35 pad 0.65)
  Top 0.15: v3.4,40.6 3.4,32.59 PCB1.P$19
  Bottom 0.15: J2.MOSI 9.6,47 8.43,45.83 7.72,45.83 7.19,45.3 4.1,45.3 3.4,44.6 v3.4,40.6
N$1  (via drill 0.35 pad 0.65)
  Top 0.15: RA2.P$3 49.69,49.02 49.56,49.02 48.8,49.77 v48.8,50.1 | v47,51.9 46.2,52.7 U7.31
  Bottom 0.15: v48.8,50.1 v47,51.9
N$2
  Top 0.15: RA2.P$2 49.69,49.81 49.56,49.81 49.42,49.95 49.42,50.36 46.59,53.2 42.57,53.2 42.27,53.5 U7.30
N$3
  Top 0.15: R7.1 10.95,7.4 12.3,7.4 12.55,7.65 13,7.65 13.17,7.49 15.29,7.49 15.65,7.13 15.65,6.7 LED1.PWR_GRN_A
N$4
  Top 0.305: Q1.P$3 10.15,53 X2.2
N$8
  Top 0.254: U3.P$8 46.86,35.6 C7.1
N$9
  Top 0.2: U3.P$6 45.69,38.44 R3.1 R4.2
N$10
  Top 0.254: U2.P$8 46.86,22.27 C6.1
N$11
  Top 0.2: U2.P$6 46.48,24.61 45.43,23.55 R1.1 45.23,23.05 R2.2
N$18
  Top 0.15: U7.7 47.25,49.75 46.3,48.8 X1.1
N$19
  Top 0.15: U7.8 48.05,49.75 48.7,49.1 X1.3
N$28
  Top 0.15: R8.2 28.2,58 27.05,56.85 27.05,56.12 26.13,55.2 24.35,55.2 PZ1.P$2
N$36
  Top 0.15: LED1.PI_DATA_GRN_A 15.45,4.15 14.9,4.7 14.9,5.25 14.5,5.65 14.5,6.22 14.34,6.38 14.02,6.38 RA1.P$8
N$37
  Top 0.15: LED1.PI_DATA_RED_A 15.4,3.3 14.6,4.1 14.6,5.13 14.2,5.53 14.2,5.95 RA1.P$7
PCB_TEMP  (via drill 0.35 pad 0.65)
  Top 0.15: U5.P$2 21.35,50.9 22.75,50.9 24.25,52.4 24.25,53.52 25.63,54.9 26.25,54.9 27.8,56.45 v27.8,56.7 | v34.2,57.6 36,57.6 36.65,56.95 37.53,56.95 37.58,57 38.2,57 v38.6,57.4 | v44.05,57.9 U7.22
  Bottom 0.15: v34.2,57.6 30.48,57.6 30.23,57.35 28.45,57.35 v27.8,56.7 | v44.05,57.9 39.1,57.9 v38.6,57.4
PDIV_V5_AUX_LPF
  Top 0.15: R13.1 R14.2 C18.1 36.48,63.4 37.01,63.92 40.33,63.92 40.33,62.45 40.27,62.4 40.27,59.41 42.34,57.35 45.75,57.35 46.45,58.05 U7.19
PDIV_V5_PI_LPF
  Top 0.15: 33.15,59.1 R10.2 C16.1 | 33.15,59.1 R9.1 | 33.15,59.1 33.1,59.05 33.1,57.92 33.97,57.05 34.43,57.05 34.68,57.3 35.85,57.3 36.5,56.65 37.65,56.65 37.7,56.7 U7.26
PDIV_VBATT_LPF
  Top 0.15: U7.25 39.8,57.5 39.5,57.8 39.5,58.55 R15.1 R16.2 C19.1
PGOOD_AUX  (via drill 0.35 pad 0.65)
  Top 0.15: U7.1 42.45,48.27 41.8,47.62 34.96,47.62 34.54,47.2 v34.19,47.2 | v46.26,36.62 46.26,37.76 46.3,37.8 46.84,37.8 U3.P$7
  Bottom 0.15: v34.19,47.2 34.31,47.08 34.31,45.54 36.08,43.77 39.6,43.77 40.9,42.48 40.9,38 40.65,37.75 40.65,37.3 40.97,36.98 41.43,36.98 41.75,37.3 41.75,37.33 42.77,38.35 43.23,38.35 43.78,37.8 45.7,37.8 46.26,37.24 v46.26,36.62
PGOOD_PI  (via drill 0.35 pad 0.65)
  Top 0.15: U7.32 40.96,50.88 40.8,50.73 40.8,48.92 40.43,48.55 39.97,48.55 39.9,48.62 32.68,48.62 32.04,47.98 v32.02,47.98 | v32.13,42.31 32.13,41.95 32.88,41.2 33.67,41.2 34.02,40.85 34.42,40.85 37.5,37.77 40.12,37.77 41.58,36.33 41.58,31.03 41.77,30.83 41.77,30.43 42,30.2 42,29.33 41.89,29.23 41.89,28.77 42,28.67 42,26.73 v41.88,26.6 | U2.P$7 46.86,23.84 46.76,23.73 46.52,23.73 46.38,23.6 46.38,23.34 45.87,22.82 45.85,22.82 v45.6,22.57
  Bottom 0.15: v41.88,26.6 45.6,22.88 v45.6,22.57 | v32.02,47.98 32.02,47.6 32.2,47.42 32.2,43.4 32.2,43.1 32.2,42.38 v32.13,42.31
PI_DATA_GRN_C  (via drill 0.35 pad 0.65)
  Top 0.15: LED1.PI_DATA_GRN_C 18.07,3.77 18.24,3.77 18.38,3.64 18.38,0.96 17.94,0.53 6.47,0.53 6.2,0.8 6.2,2.42 6.59,2.81 6.59,4.39 v8.1,5.9
  Bottom 0.15: v8.1,5.9 8.1,6.25 8.23,6.39 8.23,6.84 7.91,7.17 7.43,7.17 7.42,7.16 7.1,7.16
  Bottom 0.152: 7.1,7.16 5.76,8.51 5.76,13.84 4.77,14.83 PCB1.P$7
PI_DATA_RED_C  (via drill 0.35 pad 0.65)
  Top 0.15: LED1.PI_DATA_RED_C 17.32,3.67 17.16,3.67 16.88,3.96 16.88,4.49 16.74,4.62 15.4,4.62 15.2,4.82 15.2,5.38 14.8,5.78 14.8,6.35 14.46,6.68 14.41,6.68 14.28,6.83 14.28,7.05 14.14,7.18 13.16,7.18 13.07,7.1 v12.78,7.1
  Bottom 0.15: v12.78,7.1 12.78,13.03 8.1,17.7 8.1,20.1 7.14,21.06 PCB1.P$11
POWER_BUTTON  (via drill 0.35 pad 0.65)
  Top 0.15: U7.11 47.6,53.5 v47.5,53.4 | v44.9,52.1 44.07,51.27 42.08,51.27 41.9,51.09 41.9,48.15 41.68,47.92 34.84,47.92 34.68,47.77 v33.62,47.77 | v6.85,29.9 6.6,30.15 6.6,36.86 6.8,37.06 6.8,40.87 8.45,42.52 12.63,42.52 13.61,43.51 28.37,43.51 28.72,43.86 29.63,43.86 29.65,43.88 30.06,43.88 30.39,43.54 32.14,43.54 33.7,41.98 33.7,41.6 34.15,41.15 v34.9,41.15
  Top 0.152: SW1.1 8.5,1.8 v9.2,2.5
  Bottom 0.15: v6.85,29.9 3.45,29.9 PCB1.P$18 | v44.9,52.1 44.9,53.2 45.1,53.4 v47.5,53.4 | v34.9,41.15 34.3,41.75 34.2,41.75 33.62,42.33 v33.62,47.77
  Bottom 0.152: v9.2,2.5 8.25,3.45 7.07,3.45 6.66,3.86 6.66,5.64 5.24,7.06 3.46,7.06 3.3,7.22 3.3,27.61 PCB1.P$18
POWER_LED_GREEN  (via drill 0.35 pad 0.65)
  Top 0.15: R7.2 8.35,4.75 v8.1,5
  Bottom 0.15: 7.3,7.46 8.04,7.46 8.65,6.85 8.65,5.67 8.1,5.12 v8.1,5 | 6.7,17.2 7.7,18.2 7.7,18.66 7.38,18.98 6.02,18.98 4.93,20.07 4.36,20.07 3.78,20.65 3.78,21.46 4.77,22.45 PCB1.P$13
  Bottom 0.152: 6.7,17.2 6.7,8.06 7.3,7.46
RED_POWER  (via drill 0.35 pad 0.65)
  Top 0.15: LED1.PWR_RED_A 15.5,5.3 15.5,5.5 15.1,5.9 v15.1,6.9 | v31,48.2 31.46,48.2 31.79,48.53 32.17,48.53 32.55,48.92 40.02,48.92 v40.2,49.1 | v51.3,50.8 RA2.P$8 | v15.1,9.9 7.12,17.88 6.92,17.88 6.6,18.2 6.6,26.33 7.05,26.78 7.05,27.24 6.9,27.39 6.9,28.75 7.7,29.55 7.7,30.25 7.2,30.75 7.2,36.61 7.4,36.81 7.4,40.62 8.7,41.92 12.88,41.92 13.86,42.91 28.62,42.91 28.97,43.26 29.67,43.26 29.99,42.94 31.17,42.94 v31.42,42.69
  Bottom 0.15: v15.1,6.9 v15.1,9.9 | v31.42,42.69 31.9,43.17 31.9,47.3 v31,48.2 | v40.2,49.1 42.27,47.02 44.2,47.02 44.75,47.58 44.75,47.83 45.07,48.15 45.53,48.15 45.85,47.83 45.85,47.78 46.2,47.43 48.33,47.43 51.3,50.4 v51.3,50.8
RED_POWER_LED
  Top 0.15: U7.10 48.8,52.7 48.6,52.5 48.6,51.61 49.96,50.25 RA2.P$1
RESET  (via drill 0.35 pad 0.65)
  Top 0.15: RA2.P$5 51.88,47.88 53.8,47.88 v54,48.08 | SW2.1 v25.4,57.4 | U7.29 41.1,54.3 | 41.1,54.3 40.85,54.55 37.45,54.55 37.25,54.35 36.55,54.35 36.35,54.55 33.93,54.55 33.53,54.95 33.07,54.95 31.82,53.7 v31.82,53.4 | 41.1,54.3 41.5,54.3 42.35,55.15 43.03,55.15 43.13,55.05 46.15,55.05 v46.8,55.7
  Bottom 0.15: J1.2-RESET 53.7,55.67 | 53.7,55.67 46.83,55.67 v46.8,55.7 | 53.7,55.67 53.7,48.38 v54,48.08 | v25.4,57.4 25.4,56.45 28.45,53.4 v31.82,53.4
RX
  Top 0.15: RA2.P$7 52.95,49.45 54.09,50.59 J1.6-RX
RXD
  Top 0.15: PCB1.P$10 0.91,18.52 0.62,18.8 0.62,44.62 1,45 J2.RXD
SCL_MASTER
  Top 0.15: J2.SCL 23.06,46 21.5,46 20.89,45.38 20.89,44.66 20.4,44.17 13.43,44.17 12.38,43.12 8.21,43.12 6.2,41.12 6.2,37.3 6,37.1 6,28.4 4.72,27.12 4.36,27.12 3.78,26.55 3.78,25.73 4.36,25.15 4.75,25.15 6,23.9 6,14.67 PCB1.P$5
SCL_UC
  Top 0.15: U7.28 39.9,55.1 38.9,56.1 37.95,56.1 37.9,56.05 36.25,56.05 35.6,56.7 34.93,56.7 34.68,56.45 30.55,56.45 27.5,53.4 26.25,53.4 25.75,52.9 25.75,51.25 26.06,50.94 J2.SCL_UC
SCLK  (via drill 0.35 pad 0.65)
  Top 0.15: PCB1.P$23 5.9,37.43 5.9,42 v6.6,42.7
  Bottom 0.15: v6.6,42.7 9.2,42.7 11,44.5 11,46.2 11.8,47 J2.SCLK
SDA_MASTER
  Top 0.15: PCB1.P$3 6.3,12.43 6.3,24.02 5.86,24.46 5.86,27.15 6.3,27.59 6.3,36.98 6.5,37.18 6.5,40.99 8.33,42.83 12.5,42.83 13.55,43.88 22.27,43.88 23.4,45 J2.SDA
SDA_UC
  Top 0.15: J2.SDA_UC 25.2,45.86 25.2,47.31 25.62,47.73 25.62,48.97 25.45,49.14 25.45,53.03 26.12,53.7 27.38,53.7 30.43,56.75 34.55,56.75 34.8,57 35.73,57 36.38,56.35 37.78,56.35 37.83,56.4 39.5,56.4 40,55.9 U7.27
TX
  Top 0.15: J1.7-TX 53.92,49.33 53.25,48.65 RA2.P$6
TXD
  Top 0.15: PCB1.P$8 0.82,15.98 0.33,16.48 0.33,44.75 0.88,45.3 6.36,45.3 J2.TXD
UCUSER_GRN_A
  Top 0.15: LED1.UC_DATA_GRN_A 15.45,2.15 14.3,3.3 14.3,4.9 14.05,5.15 RA1.P$6
UCUSER_RED_A
  Top 0.15: LED1.UC_DATA_RED_A 14.9,1.3 14.32,1.88 14.32,2.69 13.65,3.37 RA1.P$5
VIN  (via drill 0.35 pad 0.65)
  Top 0.15: C4.1 54.3,32.8 | U4.P$1 54.94,16.73 55.02,16.65
  Top 0.23: C5.P$2 33.2,54.3 v33.3,54.4
  Top 0.254: v33.3,54.4 33.3,54 31.9,52.6 31.9,51.2 | v37.3,57.5 37.3,58.05 R15.2 | 31.9,51.2 30.3,49.6 30.3,48.62 30.31,48.62 30.31,47.69 J2.V12 | C5.P$2 34.95,53.4 U1.P$1 | U1.P$3 34.94,51.45 34.02,50.52 32.38,50.52 31.9,51.01 31.9,51.2
  Top 0.406: U3.P$2 51.72,37.78 C2.1 | U2.P$2 51.72,23.95 C1.1 | U4.P$1 54.52,16.73 54.7,16.9 54.7,17.3 | 54.7,17.3 54.62,17.38 | U4.P$2 54.62,17.38 | 54.62,17.38 55.14,17.38 | U4.P$3 54.62,18.02 54.7,18.1 54.7,17.3
  Top 1.016: 54.5,43.81 54.37,43.94 36.35,43.94 36.14,44.15 35.85,44.15 33,47 J2.V12
  Top 1.27: C1.1 55.02,19.86 55.02,16.65 55.02,15.41 53.5,13.9 C3.1 | 53.72,37.38 54.01,37.38 55.03,38.4 55.02,42.49 54.94,42.63 55.02,42.84 55.01,42.84 55.01,43.3 54.5,43.81
  Top 1.5: C2.1 53.72,37.38 54.3,36.8 54.3,32.8 54.3,23.6 53.85,23.15 C1.1
  Bottom 0.254: v33.3,54.4 33.3,56.3 34,57 34.45,57 34.95,57.5 v37.3,57.5
  pour Top (no thermals): 53.03,36.53 53.03,37.83 48.83,37.83 48.83,37.53 49.43,37.53 49.43,36.93 49.83,36.53
  pour Top (no thermals): 53.03,22.7 53.03,24 48.83,24 48.83,23.7 49.43,23.7 49.43,23.1 49.83,22.7
  pour Top (no thermals): 54.3,19.1 54.3,16.5 55.6,16.5 55.6,38.1 52.9,38.1 52.9,36.5 53.4,36.5 53.6,36.3 53.6,24.5 53.2,24.1 50.1,24.1 50.1,21.1 52.3,21.1
VIN_POSTFUSE
  Top 0.15: U4.P$5 51.65,18.02 | U4.P$9 51.95,17.73 51.65,18.02 | U4.P$6 51.65,18.02
  Top 0.406: U4.P$5 49.67,18.68 | U4.P$6 49.67,18.02 F1.P$2 49.08,17.38 | U4.P$7 49.08,17.38 | U4.P$8 48.52,16.73 48.5,16.7 48.5,16.8 49.08,17.38
VIN_PREFUSE
  Top 1.27: F1.P$1 43.85,14.39 J3.PIN
  Top 1.6: J4.P$1 29.26,5.14 30.2,4.2 38,4.2 40.4,6.6 40.4,8.6 44.5,12.7 J3.PIN
VOUT_1
  Top 0.15: U6.5 44.98,33.27 44.98,33.88 44.74,34.12 44.72,34.12 44.42,34.42 44.42,38.38 44,38.8 44,41.1 43.8,41.3 42.8,41.3 42.7,41.4 R6.1
  Top 0.406: U3.P$4 48.96,39.53 46.86,39.53 | 46.86,39.53 U3.P$5 | C10.1 46.86,41.82 46.86,39.53 | R3.2 46.71,39.68 46.86,39.53
  Top 1.27: R6.1 42.7,42.2 45.76,42.2 C10.1
  pour Top (no thermals): 49.23,38.93 49.23,39.73 47.63,39.73 47.63,43.33 44.23,43.33 44.23,38.93 47.03,38.93 47.03,39.33 48.63,39.33 48.63,38.93
VOUT_2
  Top 0.15: U6.3 44.43,27.62 R5.1 | R5.1 45.05,25.43 R1.2 | R5.1 45.56,27 46.86,25.7
  Top 0.406: U2.P$4 48.96,25.7 46.86,25.7 | 46.86,25.7 U2.P$5 | C9.1 46.86,28.79 46.86,25.7 | 46.86,25.7 45.68,25.7 R1.2
  pour Top (no thermals): 49.23,25.1 49.23,25.9 48.43,25.9 48.43,27.7 44.63,27.7 44.63,25.1 47.03,25.1 47.03,25.5 48.63,25.5 48.63,25.1
VSENSE_5V_AUX
  Top 0.15: U6.7 43.77,38.03 43.42,38.38 37.83,38.38 36.88,39.33 36.88,40.41 35.55,41.74 35.51,41.74 35.25,42 34.5,42 34.3,42.2 34.3,42.23 32.39,44.14 30.64,44.14 30.14,44.64 30.14,45.03 29.34,45.83 28.5,45.83 26.85,44.17 25.72,44.17 24.9,44.99 24.9,48.18 24.4,48.68 24.4,50.95 24.85,51.4 24.85,53.27 25.88,54.3 26.6,54.3 29.65,57.35 30.23,57.35 30.55,57.67 30.55,58.13 30.62,58.21 30.62,58.4 30.65,58.42 30.65,60.4 R12.2
VSENSE_5V_PI  (via drill 0.35 pad 0.65)
  Top 0.15: U6.1 43.13,29.92 42.38,30.68 42.38,31.08 42.17,31.28 42.17,37.5 41.6,38.08 37.7,38.08 36.58,39.2 36.58,40.29 35.43,41.44 35.39,41.44 35.13,41.7 34.38,41.7 34,42.08 34,42.1 32.26,43.84 30.52,43.84 30.18,44.17 29.05,44.17 29.03,44.16 28.59,44.16 28.28,43.84 25.27,43.84 v25.06,44.06 | R11.2 28.98,62.42 28.98,57.75 28.35,57.12 28.35,56.47 26.48,54.6 25.75,54.6 24.55,53.4 24.55,51.65 23.9,51 v23.9,48.4
  Bottom 0.15: v25.06,44.06 25.06,44.23 24.89,44.4 24.89,47.34 24.8,47.43 24.8,48.03 25,48.23 25.32,48.23 25.62,48.53 25.62,48.97 25.32,49.27 24.88,49.27 24.57,48.97 24.57,48.65 24.33,48.4 v23.9,48.4

## Text on the board
tPlace: RESET uC | 7-15V | DC IN
bPlace: - | FAN | +
tNames: 12 | G / N / D | 5 | VIN | GND | 5V PI | GND | B+ | B- | POWER
bNames: YRL039 - Version 1.0 - JAH - Sept 2019
Reference: YRL039 - StepDown Power for Raspberry Pi